# EAGLE board Arquitetura EP1 Avançado (EAGLE 9.7.0)

Size 190.82 x 168.21 mm. Coordinates in mm from the lower left corner, seen from the top.
Outline: 0,0 190.82,0 190.82,168.21 0,168.21 0,0
Copper layers (1*16): Top 0.035mm / dielectric 1.5mm / Bottom 0.035mm
Design rules "default": minimum track width 6mil, minimum drill 0.35mm, track to track 6mil, track to pad 6mil, pad to pad 6mil, via to via 6mil, smd to smd 6mil, copper to edge 40mil, drill to drill 6mil, minimum pad ring 10mil, minimum via ring 8mil, stop-mask expansion 4mil, vias tented up to drill 0mil, thermal gap 10mil

## Footprints (pad centres in the part's own frame; a part is rotated, then mirrored left to right if it is on the bottom)
LEDRD254W60D565H860B = drill 0.981 pad 1.581: 1 -1.27,0; 2 1.27,0
LEDRD254W60D565H860B_B = drill 0.981 pad 1.581: 1 -1.27,0; 2 1.27,0
LEDRD254W60D565H860B_G = drill 0.981 pad 1.581: 1 -1.27,0; 2 1.27,0
BATTERY-GENERIC = drill 1.118 pad 3.15 octagon: + 2.54,0; - -2.54,0
RESAD1016W63L850D250B = drill 0.83 pad 1.43: 1 -5.08,0; 2 5.08,0
SWITCH-SPDT-PTH-8.5X3.7MM = drill 1.016 pad 1.88: 1 -2.54,0; 2 0,0; 3 2.54,0
DIP762W53P254L1969H508Q14B = drill 0.743 pad 1.343: 1 -3.81,7.62; 2 -3.81,5.08; 3 -3.81,2.54; 4 -3.81,0; 5 -3.81,-2.54; 6 -3.81,-5.08; 7 -3.81,-7.62; 8 3.81,-7.62; 9 3.81,-5.08; 10 3.81,-2.54; 11 3.81,0; 12 3.81,2.54; 13 3.81,5.08; 14 3.81,7.62

## Placement (x,y rotation side)
D1  RED  [LEDRD254W60D565H860B]  184.76,8.87 0 top
D2  BLUE  [LEDRD254W60D565H860B_B]  182.22,26.65 0 top
DC1  GREEN  [LEDRD254W60D565H860B_G]  97.59,119.06 0 top
DS  RED  [LEDRD254W60D565H860B]  100.13,136.84 0 top
P1  BATTERYGENERIC  [BATTERY-GENERIC]  8.26,159.96 180 top
P2  BATTERYGENERIC  [BATTERY-GENERIC]  13.06,59.42 180 top
R1  330  [RESAD1016W63L850D250B]  93.78,131.76 0 top
R2  330  [RESAD1016W63L850D250B]  91.24,116.52 0 top
R3  330  [RESAD1016W63L850D250B]  178.41,6.33 0 top
R4  330  [RESAD1016W63L850D250B]  175.87,24.11 0 top
S1  TOGGLE  [SWITCH-SPDT-PTH-8.5X3.7MM]  32.82,131.76 0 top
S2  TOGGLE  [SWITCH-SPDT-PTH-8.5X3.7MM]  40.44,116.52 0 top
S3  TOGGLE  [SWITCH-SPDT-PTH-8.5X3.7MM]  43.79,11.41 0 top
S4  TOGGLE  [SWITCH-SPDT-PTH-8.5X3.7MM]  59.03,11.41 0 top
S6  TOGGLE  [SWITCH-SPDT-PTH-8.5X3.7MM]  74.27,11.41 0 top
U1  74HC86_PDIP  [DIP762W53P254L1969H508Q14B]  53.14,125.41 90 top
U2  74HC08_PDIP  [DIP762W53P254L1969H508Q14B]  76,125.41 90 top
U3  74HC32_PDIP  [DIP762W53P254L1969H508Q14B]  153.01,15.22 90 top
U4  74HC08_PDIP  [DIP762W53P254L1969H508Q14B]  127.61,15.22 90 top
U5  74HC86_PDIP  [DIP762W53P254L1969H508Q14B]  102.21,15.22 90 top

## Library data of the parts
D1 DS = Tinkercad; CATEGORY: Opto-Electronic; SUB-CATEGORY: LED; VALUE: LED_RED
D2 = Tinkercad; CATEGORY: Opto-Electronic; SUB-CATEGORY: LED; VALUE: LED_BLUE
DC1 = Tinkercad; CATEGORY: Opto-Electronic; SUB-CATEGORY: LED; VALUE: LED_GREEN
P1 P2 R1-R4 S1-S4 S6 U1-U5 = Tinkercad

## Nets
D1_A: D1.1 R3.2
D2_A: D2.1 R4.2
DC1_A: DC1.1 R2.2
DS_A: DS.1 R1.2
P1+: P1.+ S1.3 S2.3 U1.14 U2.14
P1-: DC1.2 DS.2 P1.- S1.1 S2.1 U1.7 U2.7
P2+: P2.+ S3.3 S4.3 S6.3 U3.14 U4.14 U5.14
P2-: D1.2 D2.2 P2.- S3.1 S4.1 S6.1 U3.7 U4.7 U5.7
U1_1A: S1.2 U1.1 U2.1
U1_1Y: R1.1 U1.3
U2_1B: S2.2 U1.2 U2.2
U2_1Y: R2.1 U2.3
U3_4Y: R4.1 U3.11
U4_3Y: U3.12 U4.8
U4_4Y: U3.13 U4.11
U5_1A: S3.2 U4.12 U5.1
U5_1B: S4.2 U4.13 U5.2
U5_1Y: U4.10 U5.3 U5.4
U5_2B: S6.2 U4.9 U5.5
U5_2Y: R3.1 U5.6

## Tracks (layer width: path | path; a pad name or v marks a point on that pad's centre or on a via)
D1_A  (1 unrouted)
D2_A  (1 unrouted)
DC1_A  (1 unrouted)
DS_A  (1 unrouted)
P1+  (4 unrouted)
P1-  (6 unrouted)
P2+  (6 unrouted)
P2-  (8 unrouted)
U1_1A  (2 unrouted)
U1_1Y  (1 unrouted)
U2_1B  (2 unrouted)
U2_1Y  (1 unrouted)
U3_4Y  (1 unrouted)
U4_3Y  (1 unrouted)
U4_4Y  (1 unrouted)
U5_1A  (2 unrouted)
U5_1B  (2 unrouted)
U5_1Y  (2 unrouted)
U5_2B  (2 unrouted)
U5_2Y  (1 unrouted)